# EAGLE board shield_ct_sensor (EAGLE 7.2.0)
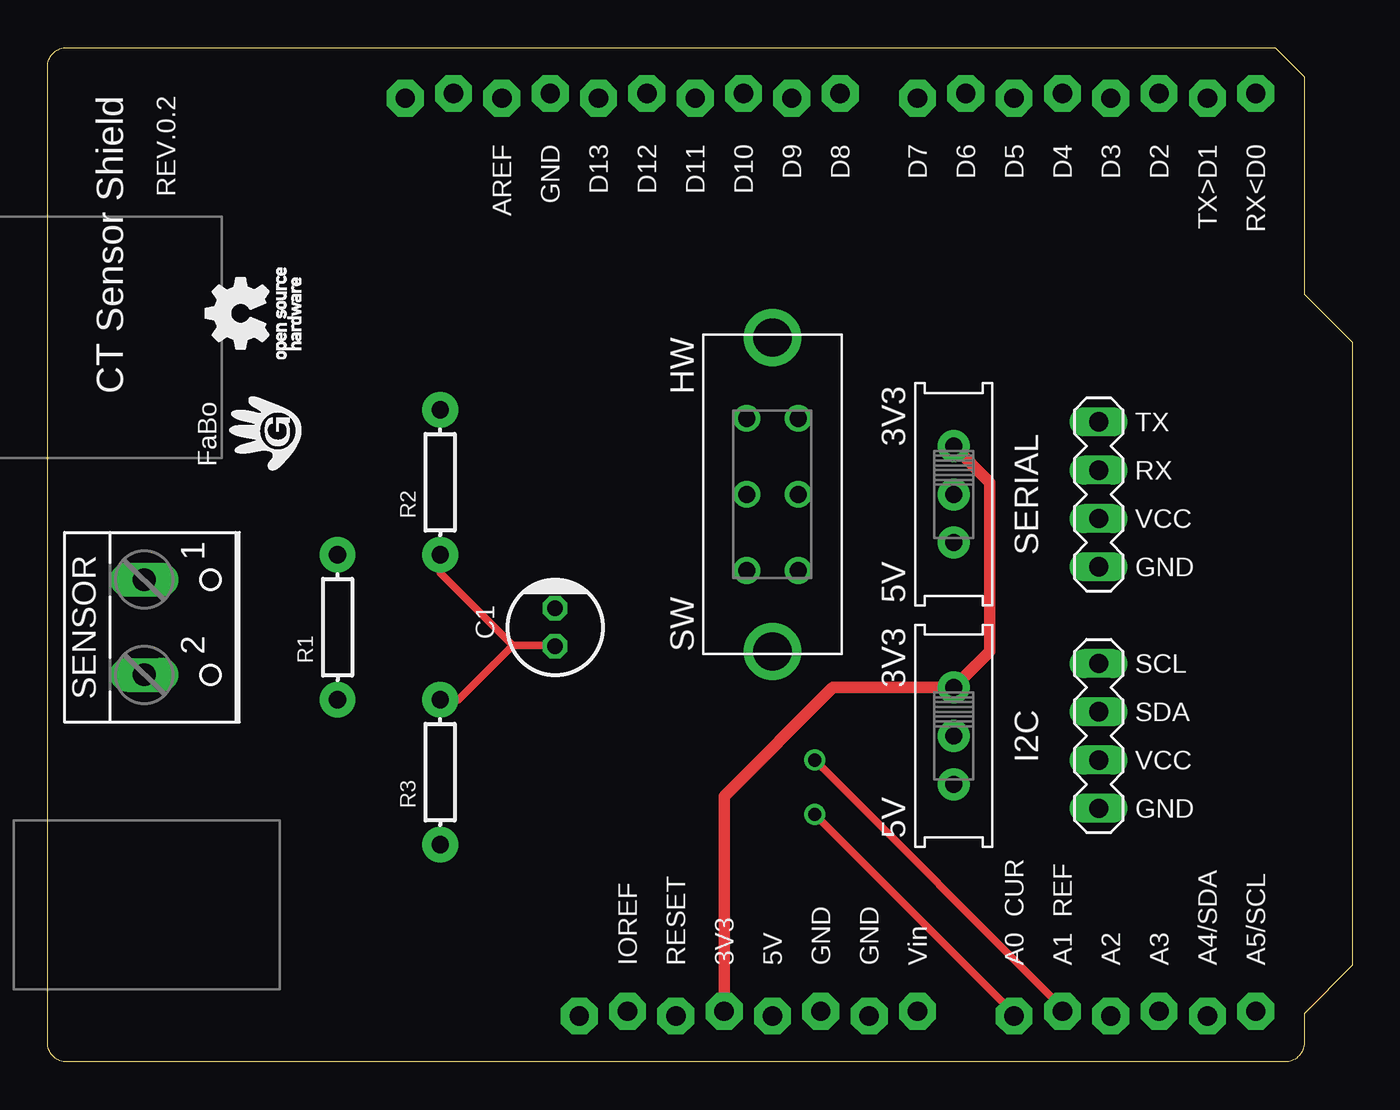
[diagram p0: board, top side]
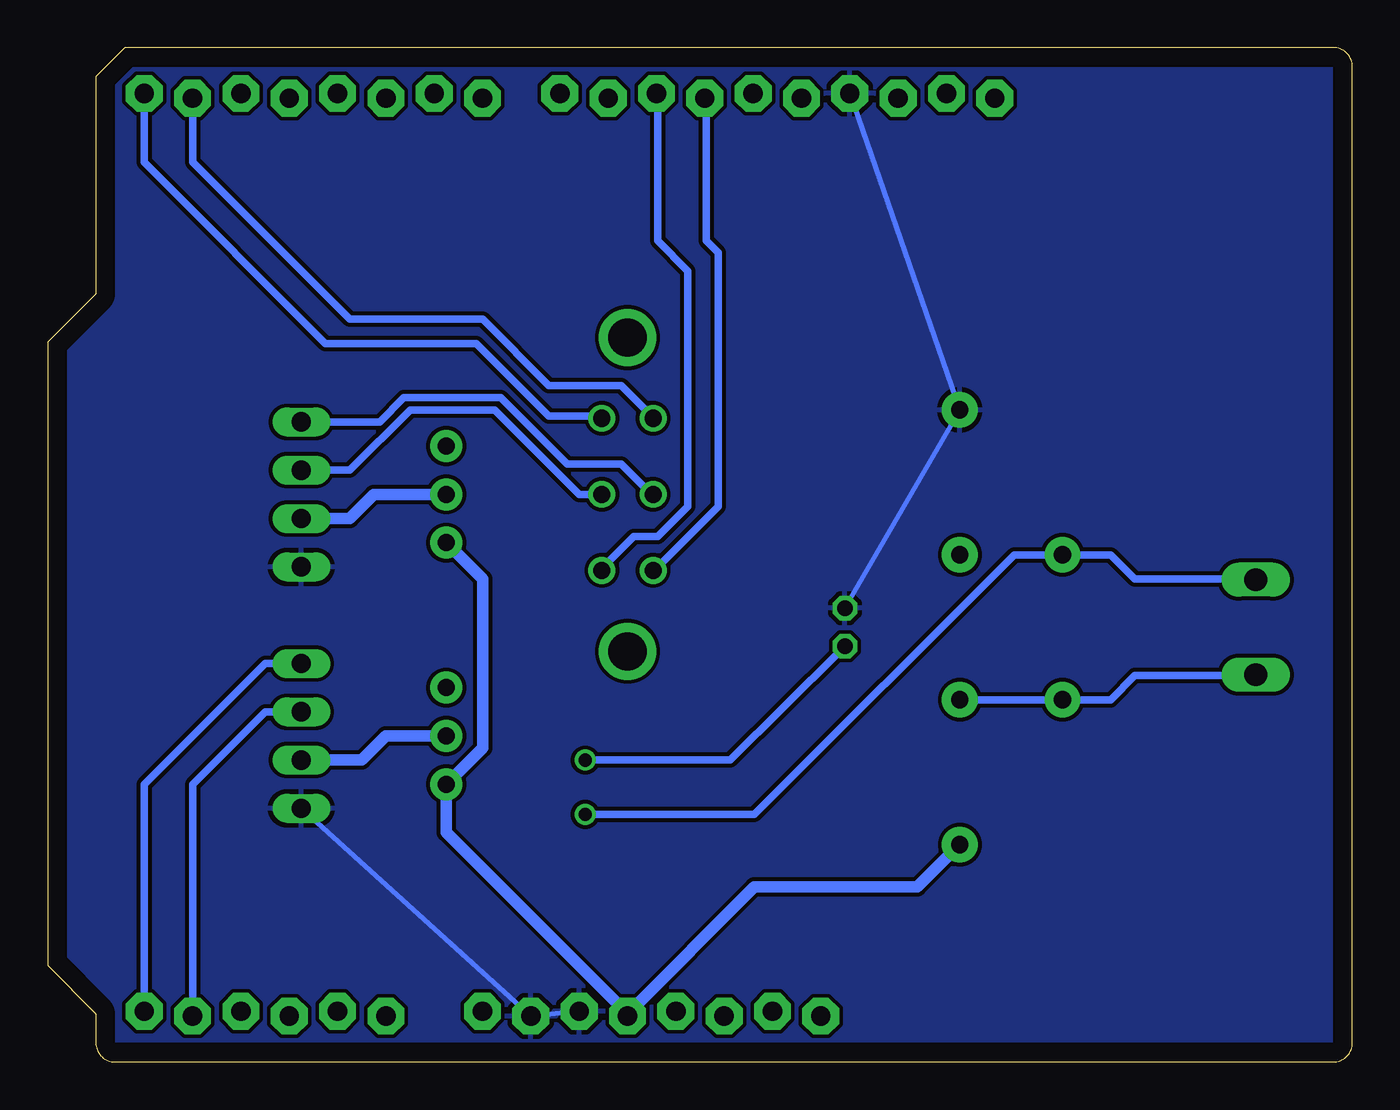
[diagram p1: board, bottom side, seen from below]

Size 68.58 x 53.34 mm. Coordinates in mm from the lower left corner, seen from the top.
Copper layers (1*16): Top 0.035mm / dielectric 1.5mm / Bottom 0.035mm
Design rules "default": minimum track width 10mil, minimum drill 24mil, track to track 8mil, track to pad 8mil, pad to pad 8mil, via to via 8mil, smd to smd 8mil, copper to edge 40mil, drill to drill 8mil, minimum pad ring 10mil, minimum via ring 8mil, stop-mask expansion 4mil, vias tented up to drill 0mil, thermal gap 10mil

## Footprints (pad centres in the part's own frame; a part is rotated, then mirrored left to right if it is on the bottom)
CAP-POL-AXL-5MM = drill 0.8 octagon: + 1,0; - -1,0
RES-AXL-REGULAR = drill 0.9 pad 1.88: P$1 -3.81,0; P$2 3.81,0
BRICK_I2C_CONNECTOR = drill 1.016 long: GND -3.81,0; SCL 3.81,0; SDA 1.27,0; VCC -1.27,0
BRICK_SERIAL_CONNECTOR = drill 1.016 long: GND -3.81,0; RX 1.27,0; TX 3.81,0; VCC -1.27,0
EG1218 = drill 0.9 pad 1.676: 1 -2.54,0; 2 0,0; 3 2.54,0
SS22F06G5-G = drill 0.9: 1 -4,1.35; 2 0,1.35; 3 4,1.35; 4 -4,-1.35; 5 0,-1.35; 6 4,-1.35 | drill 2: P$1 8.25,0; P$5 -8.25,0
ARDUINO_UNO_R3 = drill 1.016 pad 1.93 octagon: 3V3 35.56,2.667; 5V 38.1,2.413; A0 50.8,2.413; A1 53.34,2.667; A2 55.88,2.413; A3 58.42,2.667; A4 60.96,2.413; A5 63.5,2.667; AREF 23.876,50.673; D0 63.5,50.927; D1 60.96,50.673; D2 58.42,50.927; D3 55.88,50.673; D4 53.34,50.927; D5 50.8,50.673; D6 48.26,50.927; D7 45.72,50.673; D8 41.656,50.927; D9 39.116,50.673; D10 36.576,50.927; D11 34.036,50.673; D12 31.496,50.927; D13 28.956,50.673; GND1 43.18,2.413; GND2 40.64,2.667; GND3 26.416,50.927; IOREF 30.48,2.667; RESERVED 27.94,2.413; RESET 33.02,2.413; SCL 18.796,50.673; SDA 21.336,50.927; VIN 45.72,2.667
W237-102 = drill 1.194 long: 1 -2.5,-1.27; 2 2.5,-1.27

## Placement (x,y rotation side)
C1  10uF  [CAP-POL-AXL-5MM]  26.67,22.86 270 top
R1  100  [RES-AXL-REGULAR]  15.24,22.86 90 top
R2  100k  [RES-AXL-REGULAR]  20.64,30.48 270 top
R3  100k  [RES-AXL-REGULAR]  20.64,15.24 270 top
SV1  BRICK_I2C_CONNECTOR  [BRICK_I2C_CONNECTOR]  55.24,17.14 90 top
SV2  BRICK_SERIAL_CONNECTOR  [BRICK_SERIAL_CONNECTOR]  55.24,29.84 90 top
SW1  [EG1218]  47.62,17.14 270 top
SW2  [EG1218]  47.62,29.84 270 top
SW3  [SS22F06G5-G]  38.1,29.84 270 top
U1  [ARDUINO_UNO_R3]  0,0 0 top
U$2  [LOGO_GCLUE_M]  11.43,33.02 90 top
U$3  [LOGO_OSHW_T_M]  10.16,39.37 90 top
X1  [W237-102]  6.35,22.86 270 top

## Library data of the parts
C1 R1-R3 SV1 SV2 SW1-SW3 U1 U$2 U$3 = GClue
X1 = con-wago-500; MPN: 237-102; OC_FARNELL: unknown; OC_NEWARK: 70K9898

## Nets
3V3: SW1.1 SW2.1 U1.3V3
5V: R3.P$2 SW1.3 SW2.3 U1.5V
CUR: R1.P$2 U1.A0 X1.1
GND: C1.- R2.P$1 SV1.GND SV2.GND U1.GND1 U1.GND2 U1.GND3
N$1: SV2.VCC SW2.2
N$2: SV1.VCC SW1.2
N$3: SV2.TX SW3.5
N$4: SV2.RX SW3.2
REF: C1.+ R1.P$1 R2.P$2 R3.P$1 U1.A1 X1.2
RX_HW: SW3.1 U1.D0
RX_SW: SW3.3 U1.D10
SCL: SV1.SCL U1.A5
SDA: SV1.SDA U1.A4
TX_HW: SW3.4 U1.D1
TX_SW: SW3.6 U1.D11
VIN: U1.VIN

## Tracks (layer width: path | path; a pad name or v marks a point on that pad's centre or on a via)
3V3
  Top 0.61: U1.3V3 35.56,13.97 41.27,19.68 SW1.1 49.53,21.59 49.53,30.48 SW2.1
5V
  Bottom 0.406: U1.5V 38.1,2.54
  Bottom 0.61: R3.P$2 22.86,9.21 31.43,9.21 38.1,2.54 47.62,12.06 SW1.3 45.72,16.51 45.72,25.4 SW2.3
CUR  (via drill 0.7)
  Top 0.406: U1.A0 50.8,2.54 v40.32,13.02
  Bottom 0.406: X1.1 5.08,25.4 11.43,25.4 12.7,26.67 R1.P$2 17.78,26.67 31.43,13.02 v40.32,13.02
GND
  Bottom 0.254: U1.GND3 R2.P$1 C1.- | U1.GND2 U1.GND1 SV1.GND
  pour Bottom: -0.64,53.98 69.22,53.98 69.22,-0.64 -0.64,-0.64
N$1
  Bottom 0.61: SW2.2 51.44,29.84 52.7,28.57 SV2.VCC
N$2
  Bottom 0.61: SW1.2 50.8,17.14 52.07,15.88 SV1.VCC
N$3
  Bottom 0.406: SV2.TX 51.12,33.66 49.85,34.92 44.77,34.92 41.27,31.43 38.42,31.43 36.83,29.84 SW3.5
N$4
  Bottom 0.406: SV2.RX 52.7,31.11 49.53,34.29 45.09,34.29 40.64,29.84 SW3.2
REF  (via drill 0.7)
  Top 0.406: U1.A1 53.34,2.86 v40.32,15.88 | C1.+ 26.67,21.91 24.45,21.91 | 24.45,21.91 20.64,25.72 R2.P$2 | R3.P$1 21.59,19.05 24.45,21.91
  Bottom 0.406: X1.2 5.08,20.32 11.43,20.32 12.7,19.05 R1.P$1 R3.P$1 | C1.+ 26.99,21.54 32.7,15.88 v40.32,15.88
RX_HW
  Bottom 0.406: SW3.1 39.69,33.97 42.23,33.97 46.04,37.78 53.98,37.78 63.5,47.31 U1.D0
RX_SW
  Bottom 0.406: SW3.3 39.37,26.04 37.78,27.62 36.51,27.62 34.92,29.21 34.92,41.59 36.51,43.18 36.51,50.93 U1.D10
SCL
  Bottom 0.406: U1.A5 63.5,14.61 57.15,20.95 SV1.SCL
SDA
  Bottom 0.406: SV1.SDA 57.15,18.41 60.96,14.61 U1.A4
TX_HW
  Bottom 0.406: SW3.4 36.83,33.97 38.42,35.56 42.23,35.56 45.72,39.05 52.7,39.05 60.96,47.31 U1.D1
TX_SW
  Bottom 0.406: SW3.6 36.51,26.04 33.34,29.21 33.34,42.55 33.97,43.18 33.97,50.48 U1.D11

## Text on the board
tPlace: CT Sensor Shield | REV.0.2 | HW | 3V3 | TX | FaBo | RX | SERIAL | VCC | GND | 5V | SENSOR | 3V3 | SW | SCL | SDA | I2C | VCC | GND | 5V | CUR | REF